# Altium PCB Breakout.PcbDoc (part 1 of 2)
Units mil, origin at the board's own origin, x right, y up, seen from the top; angles counter-clockwise.
Board outline 5500 x 6885 mil, 2 copper layers (Top Layer, Bottom Layer); 119 components, 162 nets, 1494 pads, 75 vias.
Unrouted connection lines stored in the file: 1.
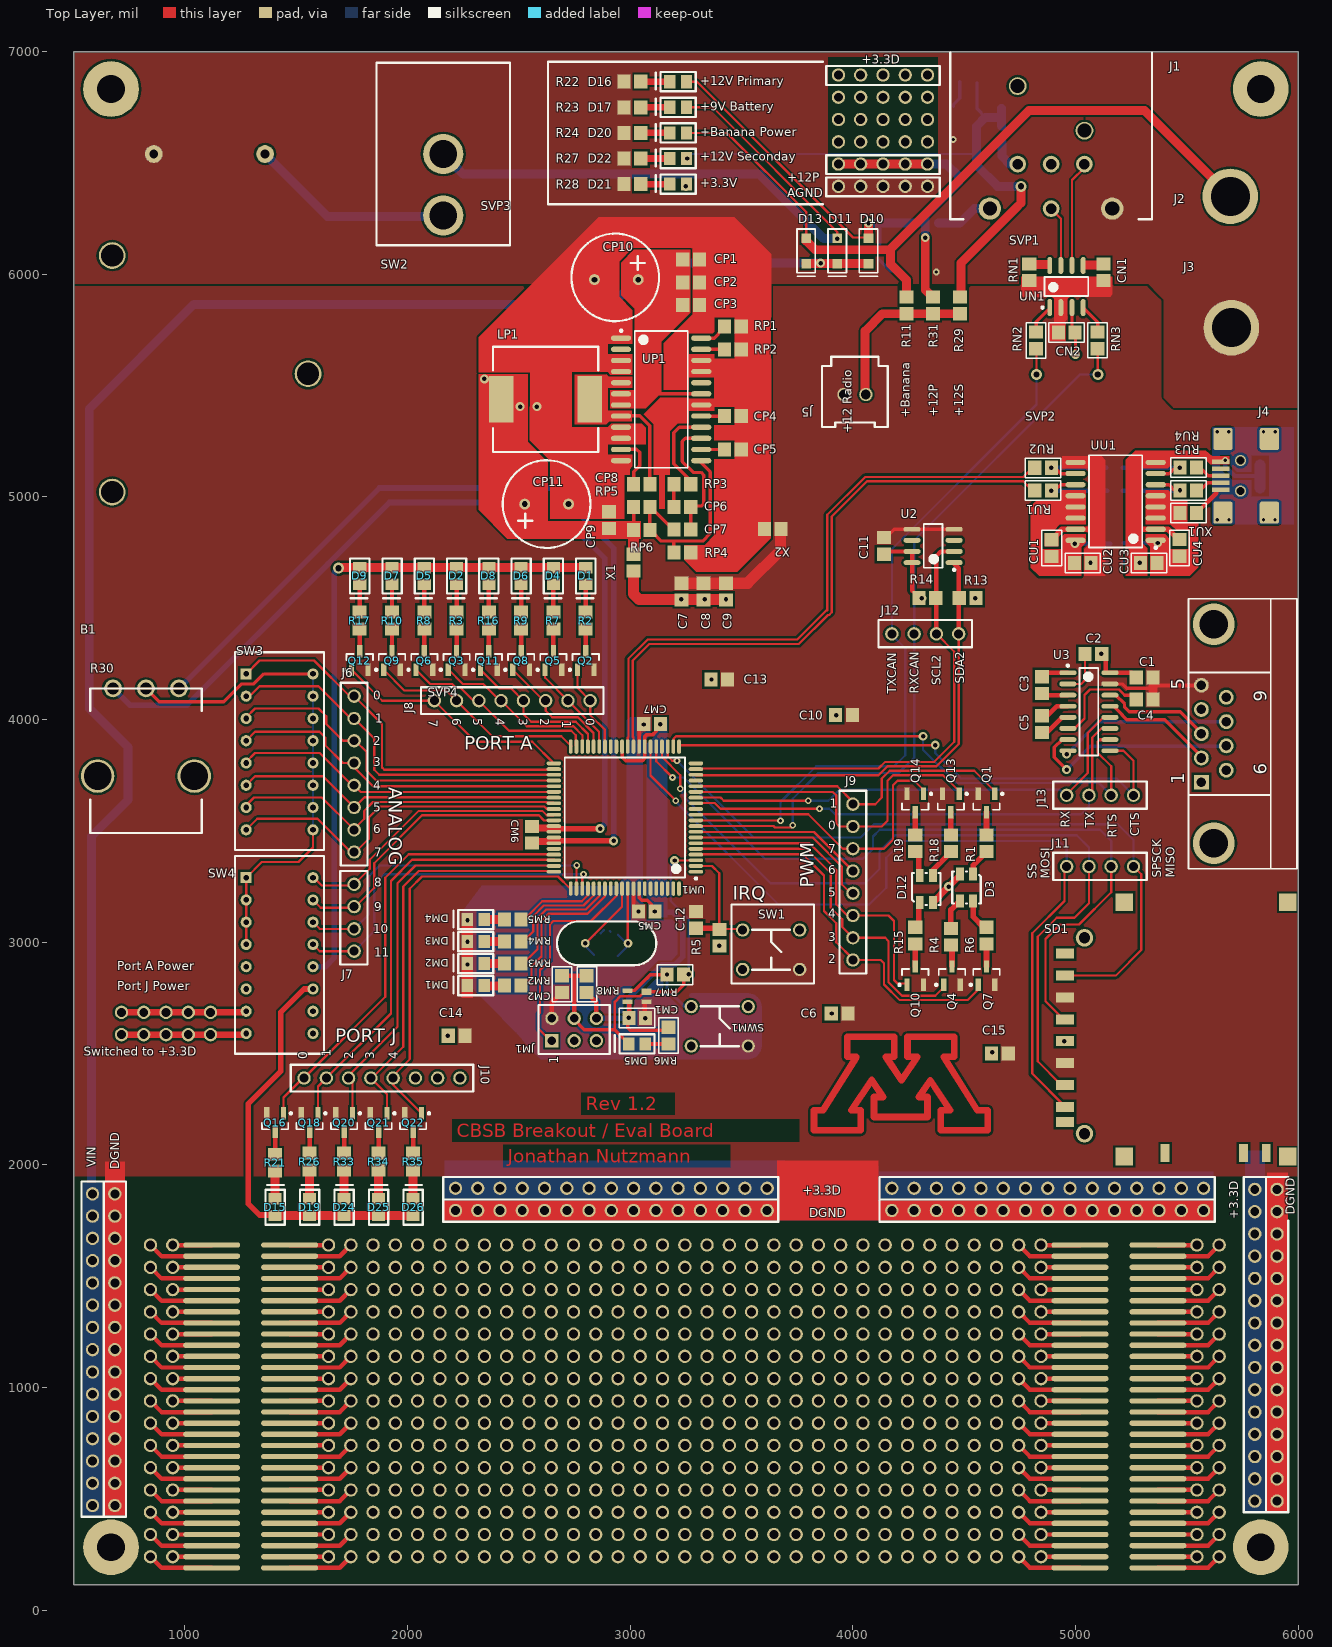
[diagram p0: Top Layer view]
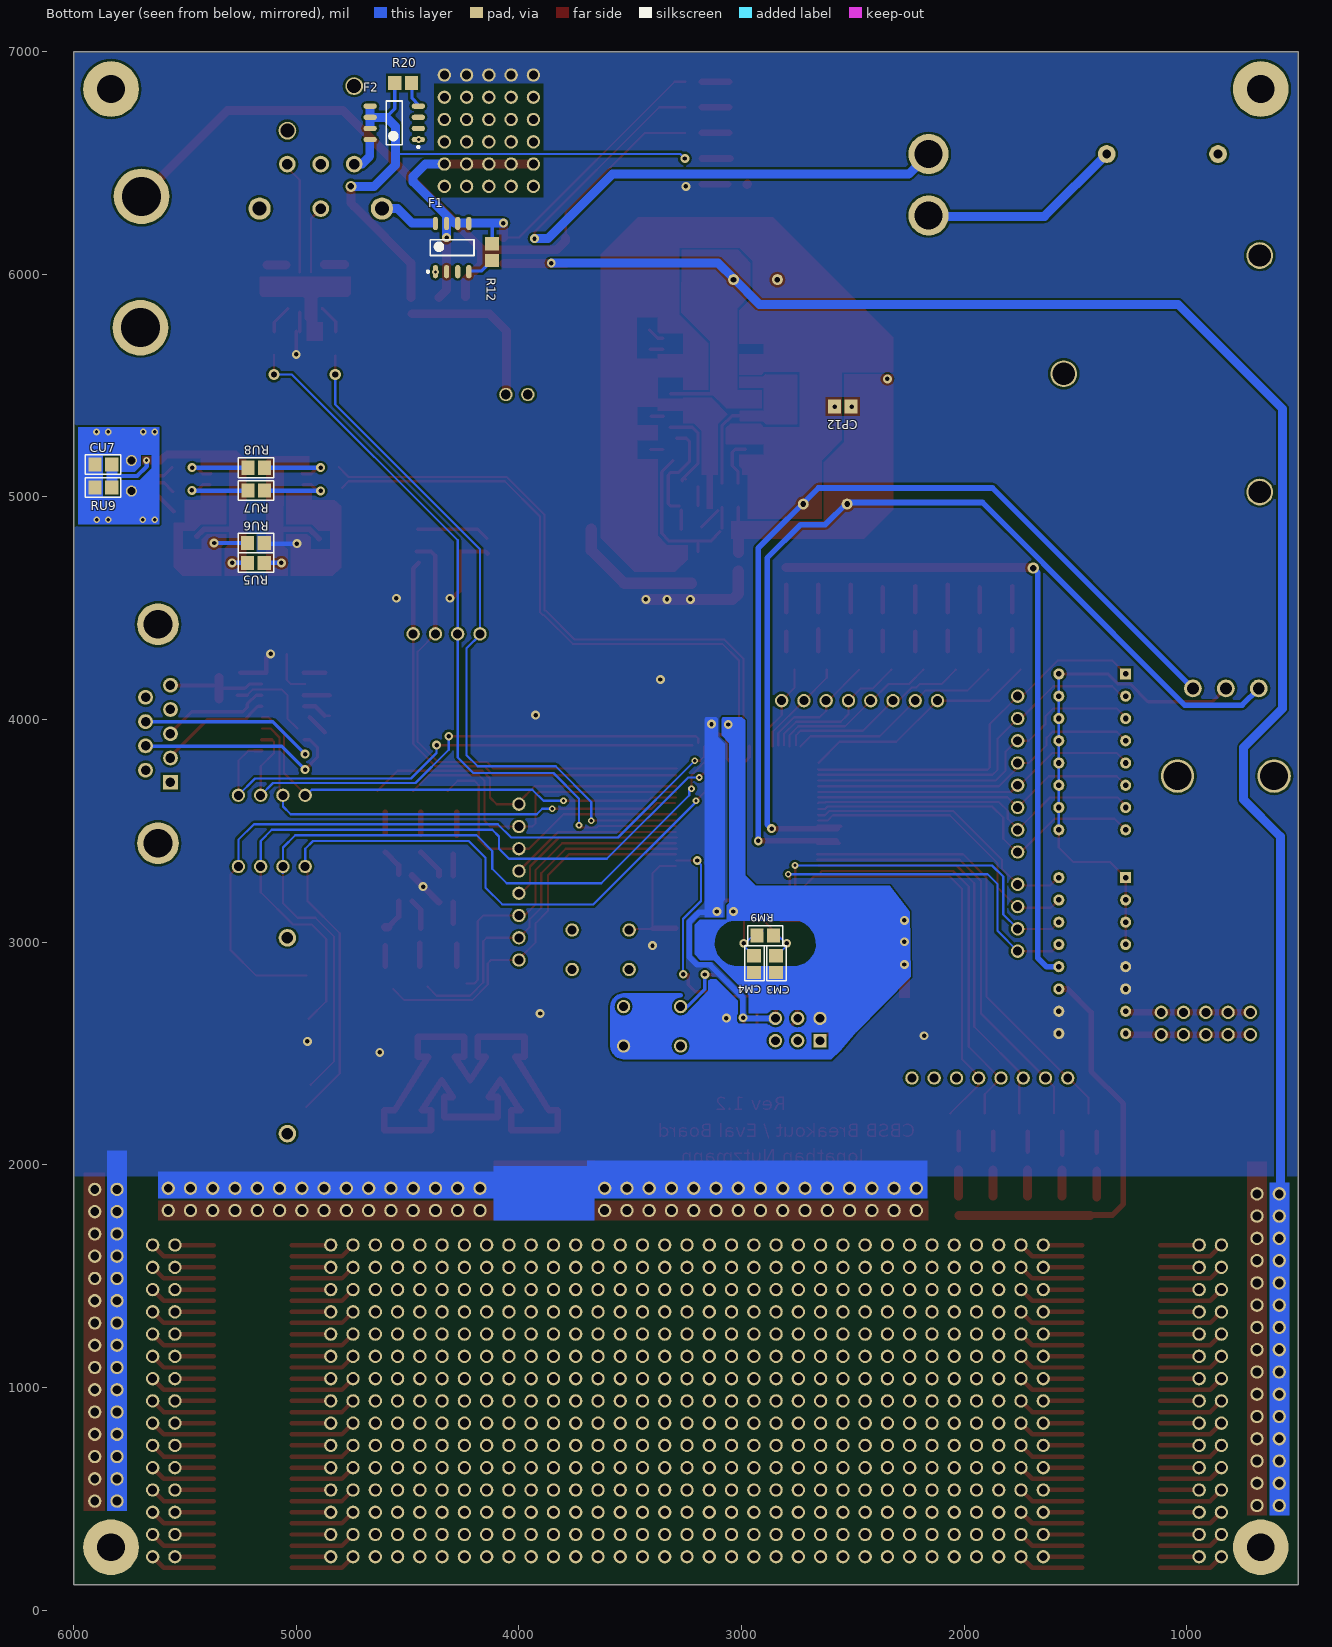
[diagram p1: Bottom Layer view, seen from below]

## Layer stack, top to bottom
Top Layer: signal copper 1.4
Dielectric: dielectric 12.6, FR-4, Dk 4.8
Bottom Layer: signal copper 1.4

## Board outline
500,115 6000,115 6000,7000 500,7000

## Design rules (kind name [scope] priority, off if disabled: settings)
Clearance SOT-23 [All vs (InComponent('U3') OR HasFootprint('SOT-23'))] p1: gap=8
Clearance Micro [All vs (InComponent('SVP4'))] p2: gap=8
Clearance [All] p3: gap=10
DiffPairsRouting [All] p1: maxlimit=10 minlimit=10 mostfreqgap=10 maxuncoupledlength=500
Height [All] p1: minheight=0 maxheight=2000 prefheight=500
HoleSize [All] p1: absolutevalues=TRUE maxlimit=250 minlimit=15 maxpercent=80.000 minpercent=20.000
PlaneConnect [All] p1: planeconnectstyle=Direct reliefexpansion=20 reliefentries=4 reliefconductorwidth=10 reliefairgap=10
PolygonConnect [All] p1: connectstyle=Direct reliefconductorwidth=10 reliefentries=4 polygonreliefangle="90 Angle"
RoutingVias [All] p1: holewidth=20 width=40 viastyle="Through Hole" minholewidth=15 minwidth=30 maxholewidth=30 maxwidth=100
SilkToSilkClearance [All] p1: silktosilkclearance=0
SilkscreenOverComponentPads [All] p1: minsilkscreentomaskgap=5
SolderMaskExpansion [All] p1: expansion=3
Width [All] p1: maxlimit=500 minlimit=10 preferedwidth=10
22 further rules are at their usual default settings.

## Classes and differential pairs
differential pair USB: +USB_P -USB_N

## Components (designator, comment, footprint, x,y, rotation, side; value= is the part's Value field where it differs from the comment)
B1 "J_9V_BATT_CLIP" "BATTERY 9V" 860,6540 r90 top
C1 "CAP 0.1uF" 0805_CAPACITOR 5310,4190 r180 top
C2 "CAP 0.1uF" 0805_CAPACITOR 5080,4295 r180 top
C3 "CAP 0.1uF" 0805_CAPACITOR 4850,4155 r270 top
C4 "CAP 0.1uF" 0805_CAPACITOR 5310,4090 r180 top
C5 "CAP 0.1uF" 0805_CAPACITOR 4850,3980 r270 top
C6 "CAP 0.1uF" 0805_CAPACITOR 3940,2680 r0 top
C7 "CAP 0.1uF" 0805_CAPACITOR 3230,4575 r90 top
C8 "CAP 0.1uF" 0805_CAPACITOR 3330,4575 r90 top
C9 "CAP 0.1uF" 0805_CAPACITOR 3430,4575 r90 top
C10 "CAP 0.1uF" 0805_CAPACITOR 3960,4020 r0 top
C11 "CAP 0.1uF" 0805_CAPACITOR 4140,4780 r90 top
C12 "CAP 0.1uF" 0805_Capacitor 3295,3100 r90 top
C13 "CAP 0.1uF" 0805_Capacitor 3400,4180 r0 top
C14 "CAP 0.1uF" 0805_Capacitor 2220,2580 r0 top
C15 "CAP 0.1uF" 0805_Capacitor 4660,2500 r0 top
D1 "D_LED_0805_YELLOW" 0805P_YELLOW 2800,4645 r90 top
D2 "D_LED_0805_YELLOW" 0805P_YELLOW 2220,4645 r90 top
D3 "D_RGB_PLCC4" "4-PLCC (RGB LED)" 4540,3300 r270 top
D4 "D_LED_0805_YELLOW" 0805P_YELLOW 2655,4645 r90 top
D5 "D_LED_0805_YELLOW" 0805P_YELLOW 2075,4645 r90 top
D6 "D_LED_0805_YELLOW" 0805P_YELLOW 2510,4645 r90 top
D7 "D_LED_0805_YELLOW" 0805P_YELLOW 1930,4645 r90 top
D8 "D_LED_0805_YELLOW" 0805P_YELLOW 2365,4645 r90 top
D9 "D_LED_0805_YELLOW" 0805P_YELLOW 1785,4645 r90 top
D10 "SCHOTTKY RECT 20V 1A SOD123F" SOD123 4070,6105 r270 top
D11 "SCHOTTKY RECT 20V 1A SOD123F" SOD123 3930,6105 r270 top
D12 "D_RGB_PLCC4" "4-PLCC (RGB LED)" 4300,3185 r90 top
D13 "SCHOTTKY RECT 20V 1A SOD123F" SOD123 3790,6105 r270 top
D15 "D_LED_0805_YELLOW" 0805P_YELLOW 1405,1810 r270 top
D16 "D_LED_0805_RED" 0805P_RED 3215,6865 r0 top
D17 "D_LED_0805_RED" 0805P_RED 3215,6750 r0 top
D19 "D_LED_0805_YELLOW" 0805P_YELLOW 1560,1810 r270 top
D20 "D_LED_0805_RED" 0805P_RED 3215,6635 r0 top
D21 "D_LED_0805_GREEN" 0805P_GREEN 3215,6405 r0 top
D22 "D_LED_0805_RED" 0805P_RED 3215,6520 r0 top
D24 "D_LED_0805_YELLOW" 0805P_YELLOW 1715,1810 r270 top
D25 "D_LED_0805_YELLOW" 0805P_YELLOW 1870,1810 r270 top
D26 "D_LED_0805_YELLOW" 0805P_YELLOW 2025,1810 r270 top
F1 "F_NIS5112" "SOIC127P600X175-8N (NIS5112)" 4300,6120 r90 bottom
F2 "F_NIS5112" "SOIC127P600X175-8N (NIS5112)" 4560,6680 r0 bottom
J1 "NC5MBH" NC5MBH 4890,6995 r0 top
J2 "POST BINDING TIN PLATE BRASS BLK" BANANA_JACK 5695,6350 r0 top
J3 "POST BINDING TIN PLATE BRASS BLK" BANANA_JACK_BLACK 5700,5760 r0 top
J4 "J_DB9F" DB9F 6245,4580 r90 top
J5 "DF1E 2-pin Male Header" DF1EC-2P-2.5DSA 3960,5460 r0 top
J6 "SOCKET_8PIN_0.100IN" 8PIN_.100IN 1760,4105 r270 top
J7 "SOCKET_4PIN_0.100IN" 4PIN_.100IN 1760,3260 r270 top
J8 "SOCKET_8PIN_0.100IN" 8PIN_.100IN 2820,4085 r180 top
J9 "SOCKET_8PIN_0.100IN" 8PIN_.100IN 4000,3620 r270 top
J10 "SOCKET_8PIN_0.100IN" 8PIN_.100IN 1535,2390 r0 top
J11 "SOCKET_4PIN_0.100IN" 4PIN_.100IN 5260,3340 r180 top
J12 "SOCKET_4PIN_0.100IN" 4PIN_.100IN 4475,4385 r180 top
J13 "SOCKET_4PIN_0.100IN" 4PIN_.100IN 5260,3660 r180 top
Q1 "RK7002BT116" SOT-23 4600,3625 r270 top
Q2 "RK7002BT116" SOT-23 2800,4265 r90 top
Q3 "RK7002BT116" SOT-23 2220,4265 r90 top
Q4 "RK7002BT116" SOT-23 4445,2850 r90 top
Q5 "RK7002BT116" SOT-23 2655,4265 r90 top
Q6 "RK7002BT116" SOT-23 2075,4265 r90 top
Q7 "RK7002BT116" SOT-23 4600,2850 r90 top
Q8 "RK7002BT116" SOT-23 2510,4265 r90 top
Q9 "RK7002BT116" SOT-23 1930,4265 r90 top
Q10 "RK7002BT116" SOT-23 4280,2850 r90 top
Q11 "RK7002BT116" SOT-23 2365,4265 r90 top
Q12 "RK7002BT116" SOT-23 1785,4265 r90 top
Q13 "RK7002BT116" SOT-23 4440,3625 r270 top
Q14 "RK7002BT116" SOT-23 4280,3625 r270 top
Q16 "RK7002BT116" SOT-23 1405,2190 r270 top
Q18 "RK7002BT116" SOT-23 1560,2190 r270 top
Q20 "RK7002BT116" SOT-23 1715,2190 r270 top
Q21 "RK7002BT116" SOT-23 1870,2190 r270 top
Q22 "RK7002BT116" SOT-23 2025,2190 r270 top
R1 "R_0805_620_1%" 0805_RESISTOR 4600,3445 r270 top
R2 "R_0805_620_1%" 0805_RESISTOR 2800,4445 r270 top
R3 "R_0805_620_1%" 0805_RESISTOR 2220,4445 r270 top
R4 "R_0805_620_1%" 0805_RESISTOR 4440,3025 r90 top
R5 "R_0805_10k_1%" 0805_RESISTOR 3400,3020 r90 top
R6 "R_0805_620_1%" 0805_RESISTOR 4600,3030 r90 top
R7 "R_0805_620_1%" 0805_RESISTOR 2655,4445 r270 top
R8 "R_0805_620_1%" 0805_RESISTOR 2075,4445 r270 top
R9 "R_0805_620_1%" 0805_RESISTOR 2510,4445 r270 top
R10 "R_0805_620_1%" 0805_RESISTOR 1930,4445 r270 top
R11 "R_0805_0" 0805_RESISTOR 4240,5860 r90 top
R12 "R_0805_56_1%" 0805_RESISTOR 4120,6100 r270 bottom
R13 "R_0805_2K_1%" 0805_RESISTOR 4515,4545 r180 top
R14 "R_0805_2K_1%" 0805_RESISTOR 4335,4545 r0 top
R15 "R_0805_620_1%" 0805_RESISTOR 4280,3030 r90 top
R16 "R_0805_620_1%" 0805_RESISTOR 2365,4445 r270 top
R17 "R_0805_620_1%" 0805_RESISTOR 1785,4445 r270 top
R18 "R_0805_620_1%" 0805_RESISTOR 4440,3445 r270 top
R19 "R_0805_620_1%" 0805_RESISTOR 4280,3445 r270 top
R20 "R_0805_56_1%" 0805_RESISTOR 4520,6860 r180 bottom
R21 "R_0805_620_1%" 0805_RESISTOR 1405,2010 r90 top
R22 "R_0805_620_1%" 0805_RESISTOR 3010,6865 r0 top
R23 "R_0805_620_1%" 0805_RESISTOR 3010,6750 r0 top
R24 "R_0805_620_1%" 0805_RESISTOR 3010,6635 r0 top
R26 "R_0805_620_1%" 0805_RESISTOR 1560,2015 r90 top
R27 "R_0805_620_1%" 0805_RESISTOR 3010,6520 r0 top
R28 "R_0805_620_1%" 0805_RESISTOR 3010,6405 r0 top
R29 "R_0805_0" 0805_RESISTOR 4480,5860 r90 top
R30 "POT 5K OHM 1/8W CARB VERTICAL" POT_296 825,4140 r270 top
R31 "R_0805_0" 0805_RESISTOR 4360,5860 r90 top
R33 "R_0805_620_1%" 0805_RESISTOR 1715,2015 r90 top
R34 "R_0805_620_1%" 0805_RESISTOR 1870,2015 r90 top
R35 "R_0805_620_1%" 0805_RESISTOR 2025,2015 r90 top
SD1 "SD_DM1AA-SF-PEJ" DM1AA 5040,2140 r90 top
SVP1 "CAN Network Circuit" SVP_CAN 4960,5950 r0 top
SVP2 "USB Isolator and Connector" SVP_USB 5520,4545 r90 top
SVP3 "Common Power Supply" SVP_POWERSUPPLY 2990,5430 r0 top
SVP4 "Common Micro" SVP_Micro 3115,4050 r180 top
SW1 "SW_TACT_SWITCH_6x6" TACT_SWITCH_6X6 3505,3055 r270 top
SW2 "SWITCH ROCKER SPST 15A W/MRKG" SWITCH_ROCKER 2160,6540 r0 top
SW3 "SW_Switch SPST 8" SWITCH_SPST_8 1275,4205 r0 top
SW4 "SW_Switch SPST 8" SWITCH_SPST_8 1275,3290 r0 top
U2 "U_TMP175" "SOIC127P600X175-8N (TMP175)" 4360,4780 r180 top
U3 "U_SN75C3232EDWR" SOIC127P600X175-16N 5060,4035 r0 top
X1 "Ferrite Bead" 0805 3015,4705 r90 top
X2 "Ferrite Bead" 0805 3640,4855 r180 top

## Footprints (in the part's own frame and the unit in brackets; to place one, negate y for a bottom-side part, rotate by r counter-clockwise, add the part's x,y. Pads: shape width x height; smd on the part's side, far side on the other; paste and mask are expansions set on the pad)
"4-PLCC (RGB LED)" [mm]
  rect 1.5x0.9 smd: 1(-0.152,0) 2(-0.152,-1.5) 3(2.902,0) 4(2.902,-1.5)
  silkscreen extent -0.45,-2.39 3.21,0.86, body extent -0.33,-2.11 3.12,0.69, height 1.91
4PIN_.100IN [mil]
  round 60 hole 40.16: 1(0,0) 2(100,0) 3(200,0) 4(300,0)
  silkscreen extent -60,-62 360,60, body extent -50,-50 350,50, height 335
8PIN_.100IN [mil]
  round 60 hole 40.16: 1(0,0) 2(100,0) 3(200,0) 4(300,0) 5(400,0) 6(500,0) 7(600,0) 8(700,0)
  silkscreen extent -60,-60 760,60, body extent -50,-50 750,50, height 335
0805 [mm] "0805 Resistor/Capacitor"
  rect 1.5x1.6 smd: 1(-0.95,0) 2(0.95,0)
  body extent -1.52,-0.76 1.52,0.76
0805_CAPACITOR [mm] "0805 Capacitor"
  rect 1.5x1.6 smd: 1(-0.95,0) 2(0.95,0)
  body extent -1.65,-0.76 1.65,0.76, height 1.24
0805_Capacitor [mm] "0805 Capacitor"
  rect 1.5x1.6 smd: 1(-0.95,0) 2(0.95,0)
  body extent -1.65,-0.76 1.65,0.76, height 1.24
0805_RESISTOR [mm] "0805 Resistor"
  rect 1.5x1.6 smd: 1(-0.95,0) 2(0.95,0)
  body extent -1.52,-0.76 1.52,0.76, height 0.5
0805P_GREEN [mm] "Chip Capacitor; Body 2.0 x 1.2 mm (LxW typ)"
  rect 1.3x1.5 smd: 1(-0.95,0) 2(0.95,0)
  silkscreen extent -2.54,-1.1 2,1.1, body extent -1.02,-0.64 0.99,0.61, height 0.79
0805P_RED [mm] "Chip Capacitor; Body 2.0 x 1.2 mm (LxW typ)"
  rect 1.3x1.5 smd: 1(-0.95,0) 2(0.95,0)
  silkscreen extent -2.54,-1.1 2,1.1, body extent -1.02,-0.64 0.99,0.61, height 0.79
0805P_YELLOW [mm] "Chip Capacitor; Body 2.0 x 1.2 mm (LxW typ)"
  rect 1.3x1.5 smd: 1(-0.95,0) 2(0.95,0)
  silkscreen extent -2.54,-1.1 2,1.1, body extent -1.02,-0.64 0.99,0.61, height 0.79
BANANA_JACK [mil]
  round 250 hole 175: 1(0,0)
  body extent -220,-220 220,220, height 900
BANANA_JACK_BLACK [mil]
  round 250 hole 175: 1(0,0)
  body extent -220,-220 220,220, height 900
"BATTERY 9V" [mil]
  round 80 hole 40: 1(0,0) 2(0,-500)
  round 120 hole 100: 3(-456,187) 4(-1518,187) 5(-987,-693)
  body extent -2054,-843 81,342, height 805
DB9F [mm]
  rect 1.69x1.69 hole 1.09: 1(-21.888,17.268)
  round 1.69 hole 1.09: 2(-19.118,17.268) 3(-16.348,17.268) 4(-13.578,17.268) 5(-10.808,17.268) 6(-20.503,14.428) 7(-17.733,14.428) 8(-14.963,14.428) 9(-12.193,14.428)
  round 4.76 hole 3.26: 10(-3.853,15.848) 11(-28.843,15.848)
  silkscreen extent -31.75,6.35 -0.95,18.75, body extent -31.73,0.38 -0.93,18.8, height 12.75
DF1EC-2P-2.5DSA [mil]
  round 60 hole 43.31: 1(0,0) 2(98.43,0)
  silkscreen extent -98,-146 197,169, body extent -98,-146 197,169, height 425
DM1AA [mm]
  round 2 hole 1.3: 0(0,0) 0(22.352,0)
  rect 1.14x2.05 smd mask+0.102: 1(3.05,2.225) 2(5.55,2.225) 3(8.05,2.225) 4(10.55,2.225) 5(13.05,2.225) 6(15.55,2.225) 7(18.05,2.225) 8(20.55,2.225) 9(1.35,2.225)
  rect 2x2 smd mask+0.102: 10(-2.6,-4.55) 11(-2.6,-23.2) 12(26.4,-23.2) 13(26.4,-4.55)
  rect 2x1 smd mask+0.102: 14(-2.2,-9.2) 15(-2.2,-18.15) 16(-2.2,-20.75)
NC5MBH [mil] "XLR 5 Male"
  round 100 hole 63: 1(274.8,-700) 5(-274.8,-700)
  round 75 hole 47.24: 2(150,-500) 3(0,-700) 4(-150,-500) 6(0,-500)
  round 80 hole 63: 7(-150,-150) 8(150,-350)
  silkscreen extent -453,-748 453,0, body extent -492,-750 492,104, height 992
POT_296 [mil]
  round 80 hole 53: 1(0,148) 2(0,0) 3(0,-148)
  round 150 hole 125: 4(394,217) 5(394,-217)
  silkscreen extent 0,-250 650,250, body extent 0,-250 650,250, height 800
SOD123 [mm]
  rect 1.1x1.1 smd: 1(-1.45,0) 2(1.45,0)
  silkscreen extent -2.5,-1.05 2.9,1.05
"SOIC127P600X175-8N (NIS5112)" [mm] "SOIC, 8-Leads, Body 5.0x4.0mm (max), Pitch 1.27mm, IPC Medium Density"
  oval 1.52x0.6 smd: 1(-2.75,1.905) 2(-2.75,0.635) 3(-2.75,-0.635) 4(-2.75,-1.905) 5(2.75,-1.905) 5(2.75,-0.635) 5(2.75,0.635) 8(2.75,1.905)
  silkscreen extent -2.87,-2.5 0.9,2.88, body extent -3.02,-2.46 2.98,2.48, height 1.55
"SOIC127P600X175-8N (TMP175)" [mm] "SOIC, 8-Leads, Body 5.0x4.0mm (max), Pitch 1.27mm, IPC Medium Density"
  oval 1.95x0.55 smd: 1(-2.4,1.905) 2(-2.4,0.635) 3(-2.4,-0.635) 4(-2.4,-1.905) 5(2.4,-1.905) 6(2.4,-0.635) 7(2.4,0.635) 8(2.4,1.905)
  silkscreen extent -2.53,-2.5 1.07,2.85, body extent -3.02,-2.46 2.98,2.48, height 1.55
SOIC127P600X175-16N [mm] "SOIC, 16-Leads, Body 10.0x4.0mm (max), Pitch 1.27mm, IPC Medium Density"
  oval 1.95x0.55 smd: 1(-2.4,4.445) 2(-2.4,3.175) 3(-2.4,1.905) 4(-2.4,0.635) 5(-2.4,-0.635) 6(-2.4,-1.905) 7(-2.4,-3.175) 8(-2.4,-4.445) 9(2.4,-4.445) 10(2.4,-3.175) 11(2.4,-1.905) 12(2.4,-0.635) 13(2.4,0.635) 14(2.4,1.905) 15(2.4,3.175) 16(2.4,4.445)
  silkscreen extent -2.52,-5 1.07,5.39, body extent -3.1,-5 3.1,5, height 1.7
SOT-23 [mm] "SOT23, 3-Leads, Body 3.0x2.7mm (max), Pitch 0.95mm, IPC Medium Density"
  rect 1.4x0.6 smd: 1(-1.05,0.95) 2(-1.05,-0.95) 3(1.05,0)
  silkscreen extent -1.17,-1.5 0.76,1.93, body extent -1.21,-1.1 0.99,1.1, height 1.1
SVP_CAN [mm]
  oval 0.55x1.95 smd: +3.3D(0.61,-2.527) CANH(-0.66,2.273) CANL(0.61,2.273) DGND(-0.66,-2.527) NetC2_1(1.88,2.273) NetR1_2(-1.93,2.273) NetR2_1(-1.93,-2.527) NetR3_1(1.88,-2.527)
  rect 1.5x1.6 smd: +3.3D(0.95,-5.385) DGND(-0.95,-5.385)
  rect 1.6x1.5 smd: DGND(-4.267,0.549) DGND(4.216,0.549) NetC2_1(4.216,2.449) NetR1_2(-4.267,2.449) NetR2_1(-3.505,-5.324) NetR3_1(3.505,-5.324) RXCAN(3.505,-7.224) TXCAN(-3.505,-7.224)
  Top Layer region: -5.207,0.991 5.207,0.991 5.207,-1.016 4.953,-1.295 0.279,-1.295 0.076,-1.524 0.076,-3.835 -0.178,-4.115 -0.178,-6.325 -2.032,-6.35 -2.032,-4.191 -1.397,-4.191 -1.397,-1.524 -1.626,-1.295 -4.928,-1.295 -5.207,-1.016
  Top Layer lines w0.254: -1.905,-2.718 -1.905,-2.515
  Top Layer lines w0.381: -3.48,-5.309 -3.48,-4.14 -2.057,-2.718 ; 0.61,-5.283 0.61,-3.048 ; 1.981,-2.667 3.531,-4.216 3.531,-5.309
  Top Layer lines w1.016: -4.47,2.362 -2.184,2.362 ; 2.21,2.337 4.343,2.337
  silkscreen extent -4.62,-8.31 4.62,0.95, body extent -5.03,-7.8 4.98,3.15, height 1.55
SVP_Micro [mil] "Micro, Clock, BDM, Reset, Debug"
  round 60 hole 40: 1(-159,1339) 3(-159,1516.17) DGND(-414.91,1516.17) SW_4(-414.91,1339)
  rect 59.06x62.99 smd: 1(-49.6,1195) 1(605.6,948) 1(605.6,1047) 1(605.6,1146) 1(605.6,1245) 2(-124.4,1195) 2(680.4,948) 2(680.4,1047) 2(680.4,1146) 2(680.4,1245) +3.3D(-20.4,70) +3.3D(3.6,911) +3.3D(121.4,1390) DGND(46.6,1390) DGND(54.4,70) DGND(78.4,911)
  rect 51.18x59.06 smd: 1(122.4,1507) 2(47.6,1507) 2(771.6,948) 2(771.6,1047) 2(771.6,1146) 2(771.6,1245) DGND(846.4,948) DGND(846.4,1047) DGND(846.4,1146) DGND(846.4,1245)
  round 39.37 hole 19.68: 1(125,1055) 2(317.13,1055)
  rect 62.99x59.06 smd far side: 1(171,1110.6) 1(270,1110.6) DGND(171,1185.4) DGND(270,1185.4)
  rect 59.06x62.99 smd far side: 1(258.4,1020) 2(183.6,1020)
  rect 62.99x59.06 smd: 1(311,1200.6) 1(421,1200.6) 2(-56,1506.4) +3.3A(556,529.6) +3.3D(-56,1431.6) +3.3D(311,1275.4) AGND(556,604.4) DGND(421,1275.4)
  rect 60x60 hole 39: 1(467,1492)
  rrect25% 45x30 smd: 2(42,1272)
  round 60 hole 39: 2(367,1492) 3(267,1492) +3.3D(267,1392) BDM_5(367,1392) DGND(467,1392)
  rrect25% 45x20 smd: 3(127,1267) +3.3D(127,1317) DGND(42,1317)
  oval 65x17 smd: 5(-179.9,630.75) 6(-179.9,605.16) 7(-179.9,579.57) 8(-179.9,553.98) 9(-179.9,528.39) 10(-179.9,502.8) 11(-179.9,477.2) 12(-179.9,451.61) 13(-179.9,426.02) 14(-179.9,400.43) 15(-179.9,374.84) 16(-179.9,349.25) 17(-179.9,323.66) 18(-179.9,298.07) 19(-179.9,272.48) 20(-179.9,246.89) 41(457.9,246.89) 42(457.9,272.48) 43(457.9,298.07) 44(457.9,323.66) 45(457.9,349.25) 46(457.9,374.84) 47(457.9,400.43) 48(457.9,426.02) 49(457.9,451.61) 50(457.9,477.2) 51(457.9,502.8) 53(457.9,553.98) 54(457.9,579.57) 56(457.9,630.75) 57(457.9,656.34) 58(457.9,681.93) 59(457.9,707.52) 60(457.9,733.11) +3.3A(457.9,528.39) AGND(457.9,605.16) U_1(-179.9,733.11) U_2(-179.9,707.52) U_3(-179.9,681.93) U_4(-179.9,656.34)
  oval 17x65 smd: 21(-104.11,171.1) 22(-78.52,171.1) 23(-52.93,171.1) 24(-27.34,171.1) 25(-1.75,171.1) 26(23.84,171.1) 29(100.61,171.1) 30(126.2,171.1) 31(151.8,171.1) 32(177.39,171.1) 33(202.98,171.1) 34(228.57,171.1) 35(254.16,171.1) 36(279.75,171.1) 37(305.34,171.1) 38(330.93,171.1) 39(356.52,171.1) 40(382.11,171.1) 61(382.11,808.9) 62(356.52,808.9) 63(330.93,808.9) 64(305.34,808.9) 65(279.75,808.9) 66(254.16,808.9) 67(228.57,808.9) 68(202.98,808.9) 69(177.39,808.9) 70(151.8,808.9) 71(126.2,808.9) 74(49.43,808.9) 75(23.84,808.9) 76(-1.75,808.9) 77(-27.34,808.9) 78(-52.93,808.9) 79(-78.52,808.9) 80(-104.11,808.9) +3.3D(49.43,171.1) +3.3D(75.02,808.9) DGND(75.02,171.1) DGND(100.61,808.9)
  Top Layer region: 821,918 872,918 872,1300 821,1300
  Top Layer pour cut-out: 23,1114 31,1123 37,1128 47,1136 57,1141 68,1146 83,1149 94,1150 352,1150 368,1147 384,1142 397,1135 410,1125 424,1109 434,1091 439,1076 441,1060 441,1048 438,1033 431,1016 423,1002 408,985 395,976 376,967 362,964 345,962 98,962 85,963 75,965 65.87,967.74 56,972 46,977 38,983 29,992 21,1002 12,1015 7,1029 4,1044 3,1056 4,1068 6,1078 9,1090 14,1099 18,1106
  Top Layer lines w10: 601,1052 551,1002 551,933 503,885 325,885 279,839 279,834 ; 592,1240 559,1207 559,1159 514,1114 514,954 482,922 307,922 228,843 228,840 228,839 228,833 228,838 ; 587,1137 532,1082 532,943 492,903 315,903 253,841 253,840 253,833 ; 585,935 579,935 510,866 333,866 306,839 306,836 305,836 304,835 ; 478,1488 527,1439 527,1373 520,1366 520,1175 476,1131 476,970 461,955 291,955 175,839 175,835 ; 367,1397 367,1393 ; 316,1055 152,891 152,851 ; 201,836 201,831 ; 152,850 152,831 ; 126,1054 126,853 126,822 ; -83,683 -179,683
  Top Layer lines w12: 184,1444 184,1318 158,1292 71,1292 52,1273
  Top Layer lines w15: 561,529 456,529 ; 555,605 455,605 ; 367,1397 321,1443 185,1443 130,1498 ; 126,1399 126,1435 115,1446 -43,1446 ; 121,1267 96,1267 36.5,1207.5 ; 100,906 100,816 ; 75,826 75,850 63,862 39,862 15,886 15,892 ; 42,1213 25,1196 -51,1196 ; 40,1273 -26,1273 -93,1273 -125,1241 -125,1196
  Top Layer lines w16: 49,162 49,126 42,119 15,119 -2,102 -2,98
  Top Layer lines w17: 75,156 75,85
  Top Layer lines w20: 468,1392 468,1322 421,1275 ; 420,1201 311,1201 ; 366,1393 366,1203 ; 312,1275 268,1319 268,1392 ; 119,1380 119,1319 ; 50,1379 50,1320 ; 48,1507 -49,1507
  Top Layer lines w40: 775,948 682,948 ; 774,1246 681,1246 ; 769,1146 676,1146 ; 766,1047 673,1047
  Bottom Layer circle w20: c-415,1516 r50
  Bottom Layer circle w20: c367,1392 r50
  Bottom Layer circle w20: c367,1492 r50
  Bottom Layer circle w20: c267,1492 r50
  Bottom Layer circle w20: c-415,1339 r50
  Bottom Layer circle w20: c-159,1516 r50
  Bottom Layer region: 269,1215 168,1215 168,1156 269,1156
  Bottom Layer region: 49,942 49,949 -73,949 -96,972 -96,1105 -71,1130 -11,1130 151,1292 151,1170 110,1170 110,1158 79,1156 54,1150 28,1132 6,1106 -2,1085 -7,1064 -6,1039 -2,1021 6,1004 20,986 35,972 50,961 72,954
  Bottom Layer pour cut-out: 421,1114 413,1123 407,1128 397,1136 387,1141 376,1146 361,1149 350,1150 92,1150 76,1147 60,1142 47,1135 34,1125 20,1109 10,1091 5,1076 3,1060 3,1048 6,1033 13,1016 21,1002 36,985 49,976 68,967 82,964 99,962 346,962 359,963 369,965 378.13,967.74 388,972 398,977 406,983 415,992 423,1002 432,1015 437,1029 440,1044 441,1056 440,1068 438,1078 435,1090 430,1099 426,1106
  Bottom Layer region: 220,1576 518,1576 558,1538 551,1532 389,1532 380,1540 373,1533 233,1533 219,1519
  Bottom Layer region: -475,1337 -438,1378 -408,1382 -381,1376 -365,1330 -378,1306 -404,1297 -434,1293 -418,1279 -159,1279 -197,1307 -202,1336 -201,1365 -180,1380 -153,1382 -131,1376 -125,1359 -112,1347 -34,1269 -34,1223 -26,1216 1,1216 98,1313 98,1368 94,1379.33 94,1405 103,1417 231,1417 234,1433 273,1436 306,1428 311,1389 309,1350 324,1350 324,1429.4 371,1435 415,1430 422,1443 632,1450 558,1538 506,1539 506,1454 429,1454 429,1533 403,1533 408,1494 403,1457 365,1451 328,1457 323,1496 333,1535 302,1535 309,1493 303,1455 266,1452 229,1458 221,1576 -159,1576 -135,1551 -122,1540 -116,1525 -118,1486 -136,1476 -166,1474 -195,1478 -208,1526 -159,1576 -419,1576 -475,1521
  Bottom Layer region: 25,46 25,121 60,156 60,873 49,884 49,943 66,954 374,954 402,967 422,984 442,1015 449,1044 450,1071 441,1099 422,1127 400,1144 367,1156 353,1158 110,1158 101,1171 147,1217 147,1369 230,1369 250,1354 383,1354 408,1370 408,1430 422,1450 554,1451 629,1454 874,1205 870,913 781,797 179,797 131,749 131,54 116,39 31,39
  Bottom Layer region: -51,46 -45,40 2,40 8,46 8,126 40,158 40,860 32,868 32,938 -51,938
  Bottom Layer lines w10: 318,1056 318,1066 278,1106 ; 317,1055 313,1055 274,1016 ; 248,1010 236,998 234,996 ; 208,999 204,1003 ; 171,1112 125,1066 125,1055 ; 170,1016 132,1054 126,1054 ; -84,682 -84,697 -72,697 -67,702 -67,865 -148,946 -148,1196
  Bottom Layer lines w15: -50,1194 -50,1261 -129,1340 -163,1340
  Bottom Layer lines w20: 232.73,1428.41 cw(c267,1392) 230.59,1357.73 ; -117.99,1368.01 ccw(c-158.5,1338.7) -158.98,1288.71
  Bottom Layer lines w25: 264,1391 121,1391 ; 121,1388 121,1299 117,1295 -26,1152 -84,1152 -120,1116 -120,960 -75,915 6,915
  silkscreen extent -372,220 909,1552, body extent -413,40 848,1547, height 418
SVP_POWERSUPPLY [mm]
  rect 1.5x1.6 smd: 1(0.625,-9.474) 1(5.248,-17.272) 1(5.248,-14.656) 1(5.248,-12.065) 1(5.248,-9.474) 1(11.013,-5.512) 1(11.013,-1.702) 1(11.013,5.918) 1(11.013,8.534) 2(2.525,-14.681) 2(2.525,-12.09) 2(2.525,-9.474) 2(7.148,-14.656) 2(7.148,-12.065) 2(7.148,-9.474) +3.3A(0.625,-14.681) +3.3A(0.625,-12.09) +12P(6.238,10.973) +12P(6.238,13.564) +12P(6.238,16.154) AGND(7.148,-17.272) AGND(8.138,10.973) AGND(8.138,13.564) AGND(8.138,16.154) AGND(12.913,-5.512) AGND(12.913,-1.702) AGND(12.913,5.918) AGND(12.913,8.534)
  rect 2.8x5.3 smd: 2(-4.348,0.203) +3.3A(-14.448,0.203)
  oval 2.3x0.6 smd: 2(-0.79,5.918) 5(-0.79,2.108) 8(-0.79,-1.702) 11(-0.79,-5.512) 13(8.36,-6.782) 14(8.36,-5.512) 15(8.36,-4.242) 16(8.36,-2.972) 17(8.36,-1.702) 20(8.36,2.108) 23(8.36,5.918) 24(8.36,7.188) +12P(-0.79,-0.432) +12P(-0.79,0.838) +12P(8.36,0.838) AGND(-0.79,-6.782) AGND(-0.79,-4.242) AGND(-0.79,-2.972) AGND(-0.79,3.378) AGND(-0.79,4.648) AGND(-0.79,7.188) AGND(8.36,-0.432) AGND(8.36,3.378) AGND(8.36,4.648)
  rect 1.5x1.6 smd far side: +3.3A(-12.228,-0.61) AGND(-10.328,-0.61)
  round 1.25 hole 0.65: +3.3A(-11.786,-11.735) +12P(1.168,13.868) AGND(-6.786,-11.735) AGND(-3.832,13.868)
  rect 1.6x1.5 smd: +3.3A(-2.159,-14.514) AGND(-2.159,-12.614)
  Top Layer region: -11.786,-15.697 1.473,-15.697 1.473,-13.691 -11.786,-13.691
  Top Layer region: 12.167,4.724 16.332,4.724 16.332,10.185 12.167,10.185
  Top Layer region: -6.1,-2.65 -2.5,-2.65 -2.5,3.05 -6.1,3.05
  Top Layer region: -8.89,-13.437 -8.89,-6.782 -11.201,-4.47 -11.176,3.302 -17.043,3.302 -17.043,7.315 -3.353,21.006 12.09,21.006 16.332,16.789 16.332,9.601 9.83,9.601 9.83,7.925 9.652,7.772 6.909,7.772 6.909,5.334 9.83,5.334 9.83,4.826 16.332,4.826 16.307,-15.646 12.471,-19.482 7.798,-19.482 6.401,-18.085 6.401,-16.408 8.738,-16.408 9.83,-15.316 9.83,-6.604 12.167,-6.604 12.167,-4.445 9.83,-4.445 9.83,-2.769 12.167,-2.769 12.167,-0.635 9.83,-0.635 9.83,-1.118 6.909,-1.118 6.909,-2.515 5.69,-2.515 4.775,-3.429 4.775,-8.382 4.216,-8.382 4.216,-12.294 3.556,-12.294 3.556,-8.382 2.946,-8.382 2.946,-2.616 1.803,-1.499 3.683,0.381 6.909,0.381 6.909,0.254 9.83,0.254 9.83,2.718 6.909,2.718 6.909,1.295 4.064,1.295 4.064,6.604 7.391,9.931 7.391,17.526 0.533,17.526 -1.016,15.977 -1.016,11.938 0.508,10.363 0.508,6.553 -2.286,6.553 -2.286,5.334 0.508,5.334 0.508,3.023 -2.032,3.023 -2.311,3.353 -6.401,3.353 -6.401,-2.972 -2.286,-2.972 -1.905,-2.591 1.575,-2.591 2.032,-3.023 2.032,-4.902 -2.261,-4.902 -2.286,-4.877 -2.286,-6.096 0.508,-6.096 0.508,-7.442 0.203,-7.747 0.203,-8.382 -0.457,-8.382 -0.457,-13.437
  Top Layer region: -2.502,-2.65 -2.496,-2.65 -2.15,-2.3 0.45,-2.3 0.45,-1.092 -2.286,-1.092 -2.286,1.524 0.508,1.524 0.508,2.769 -2.184,2.769 -2.464,3.05 -2.503,3.05
  Top Layer region: -17.043,3.048 -11.455,3.048 -11.455,-4.648 -9.144,-6.96 -9.144,-14.834 -10.033,-15.684 -13.767,-15.684 -17.043,-12.408
  Top Layer region: 7.087,17.272 7.112,10.084 3.81,6.782 3.81,0.991 2.007,-0.813 -2.032,-0.813 -2.032,1.27 0.762,1.27 0.762,10.541 -0.762,12.065 -0.762,15.799 0.66,17.272
  Top Layer lines w0.254: 6.604,-8.915 6.604,-8.941 6.706,-8.941
  Top Layer lines w0.381: -0.178,-6.731 -0.102,-6.807 ; -0.178,-5.486 0.965,-5.486 1.321,-5.842 1.321,-7.366 0.66,-8.026 0.66,-9.398 ; -0.051,0.838 8.357,0.838 ; 0.025,-1.676 1.346,-1.676 2.489,-2.819 2.489,-9.398 ; 0.635,-14.707 0.635,-12.116 ; 2.489,-14.503 2.489,-12.116 ; 2.743,-14.91 3.785,-15.951 8.509,-15.951 9.373,-15.088 9.373,-8.077 8.103,-6.807 ; 2.972,-12.471 4.813,-14.313 ; 5.232,-17.196 5.232,-15.951 ; 5.232,-11.963 5.232,-9.728 ; 7.01,-9.068 7.01,-8.915 5.232,-7.137 5.232,-3.607 5.867,-2.972 8.407,-2.972 ; 7.137,-14.605 7.137,-12.421 ; 7.366,-11.963 8.357,-11.963 8.636,-11.684 8.636,-8.433 8.331,-8.128 7.442,-8.128 6.198,-6.883 6.198,-4.597 6.553,-4.242 7.645,-4.242 ; 9.195,-1.702 10.541,-1.702 ; 9.246,-5.512 10.643,-5.512 ; 9.246,5.918 10.668,5.918 ; 9.246,7.188 9.83,7.188 10.77,8.128
  silkscreen extent -15.4,-16.73 6.81,19.12, body extent -16.03,-18.03 13.61,19.13, height 12.5
SVP_USB [mm]
  rect 1.6x1.5 smd: 1(4.039,3.901) 1(9.703,-0.594) 1(12.294,-0.594) 1(14.91,-0.594) 2(4.039,5.801) 2(9.703,1.306) 2(12.294,1.306) 2(12.294,15.966) 2(14.884,15.966) 2(14.91,1.306) +3.3D(4.039,13.345) DGND(4.039,11.445) USB_N(12.294,17.866) USB_P(14.884,17.866)
  rect 1.6x1.5 smd far side: 1(4.039,7.661) 1(6.325,7.661) 1(12.294,7.686) 1(12.649,-9.738) 1(14.884,7.686) 1(15.24,-9.738) 2(12.294,9.586) 2(12.649,-7.838) 2(14.884,9.586) 2(15.24,-7.838) +3.3D(6.325,9.561) DGND(4.039,9.561)
  rect 1.5x1.6 smd: 1(4.79,1.346) 2(6.69,1.346) +3.3D(4.765,15.926) DGND(6.665,15.926)
  oval 0.6x2.3 smd: 1(6.604,4.061) 2(7.874,4.061) 3(9.144,4.061) 4(10.414,4.061) 5(11.684,4.061) 6(12.954,4.061) 7(14.224,4.061) 8(15.494,4.061) 10(14.224,13.211) 11(12.954,13.211) +3.3D(6.604,13.211) +3.3D(9.144,13.211) +3.3D(10.414,13.211) +3.3D(11.684,13.211) DGND(7.874,13.211) DGND(15.494,13.211)
  rect 0.5x2 smd: 1(12.37,-3.353) 2(13.17,-3.353) 3(13.97,-3.353) 4(14.77,-3.353) 5(15.57,-3.353)
  rrect20% 2.5x2.2 smd: 6(9.77,-8.903) 6(9.77,-3.603) 6(18.17,-8.903) 6(18.17,-3.603)
  round 1.27 hole 0.9: 10(12.22,-5.603) 10(15.72,-5.603)
  Top Layer region: 2.54,12.217 5.588,12.217 6.071,11.735 14.808,11.76 14.808,14.707 16.18,14.707 16.18,10.222 15.748,9.804 2.54,9.804
  Top Layer region: 7.29,12.065 6.325,12.065 5.817,12.573 2.54,12.573 2.54,17.374 3.454,18.313 10.566,18.313 11.201,17.602 11.201,14.961 12.141,14.961 12.344,14.757 12.344,12.065 8.458,12.065 8.458,14.986 7.722,15.723 7.722,17.069 5.588,17.069 5.588,14.834 6.934,14.834 7.29,14.478
  Top Layer region: 2.54,5.029 5.715,5.029 6.223,5.537 14.834,5.537 14.834,2.676 15.18,2.311 15.977,2.311 15.977,-1.448 15.291,-2.159 15.291,-4.343 16.18,-4.343 16.18,-2.413 16.84,-1.651 16.84,6.426 15.773,7.493 2.54,7.493
  Top Layer region: 2.565,4.674 5.867,4.674 6.401,5.207 7.29,5.207 7.29,2.997 6.731,2.438 5.613,2.438 5.613,0.279 7.696,0.279 7.696,1.626 8.458,2.388 8.458,5.207 12.344,5.207 12.344,2.642 12.014,2.311 11.201,2.311 11.201,0.483 8.636,0.483 8.636,-0.762 3.531,-0.787 2.565,0.178
  Top Layer lines w0.381: 15.037,15.748 14.199,14.91 14.199,13.894 ; 12.421,15.443 12.954,14.91 12.954,13.995 ; 14.199,3.454 14.199,2.54 14.961,1.778 ; 12.929,3.353 12.929,2.54 12.344,1.956 ; 12.167,-0.864 13.157,-1.854 13.157,-2.642 ; 14.935,-0.965 13.97,-1.93 13.97,-2.921
  Top Layer lines w0.508: 9.906,-0.762 11.989,-2.845 12.319,-2.845
  Top Layer lines w0.635: 6.807,15.799 7.874,14.732 7.874,10.744 ; 7.874,5.969 7.874,2.667 7.087,1.88
  Bottom Layer region: 8.433,-2.413 8.433,-11.684 19.507,-11.684 19.507,-2.413 16.358,-2.413 16.358,-4.521 15.138,-4.521 14.453,-5.207 14.453,-6.833 16.307,-6.833 16.307,-8.89 11.582,-8.89 11.582,-6.833 13.437,-6.833 13.437,-4.648 14.834,-3.251 16.358,-3.251 16.358,-2.413
  Bottom Layer lines w0.508: 12.243,15.977 12.243,9.576 ; 14.91,15.977 14.91,9.677 ; 6.223,13.259 6.223,9.271 ; 4.039,11.506 4.039,9.55 ; 4.039,7.849 4.039,5.893 ; 12.268,7.823 12.268,1.295 ; 14.91,7.823 14.91,1.321 ; 6.299,7.722 6.299,3.835 ; 15.723,-3.861 15.037,-3.861 13.945,-4.953 13.945,-7.823
  Bottom Layer lines w1.27: 12.598,-7.823 15.215,-7.823
  Mechanical 15 keep-out region: 12.065,-4.369 15.875,-4.369 15.875,-5.639 17.907,-5.639 17.907,-12.116 10.033,-12.116 10.033,-5.639 12.065,-5.639
  silkscreen extent 2.9,-1.68 16.3,18.95, body extent 3.28,-11.84 18.9,18.44, height 4.12
SWITCH_ROCKER [mil]
  round 180 hole 125: 1(0,0) 2(0,-276)
  silkscreen extent -300,-410 300,410, body extent -300,-410 300,410, height 600
SWITCH_SPST_8 [mil]
  rect 50x50 hole 25: 1(0,0)
  round 50 hole 25: 2(0,-100) 3(0,-200) 4(0,-300) 5(0,-400) 6(0,-500) 7(0,-600) 8(0,-700) 9(300,-700) 10(300,-600) 11(300,-500) 12(300,-400) 13(300,-300) 14(300,-200) 15(300,-100) 16(300,0)
  silkscreen extent -50,-791 350,97, body extent -39,-789 341,96, height 350
TACT_SWITCH_6X6 [mil]
  round 60 hole 40: 1(0,0) 2(177.17,255.91) 3(177.17,0) 4(0,255.91)
  silkscreen extent -1,43 179,213, body extent -29,0 207,255, height 169

## Part data
B1: "HOLDER BATTERY 9V PC MOUNT"
C1 C2 C3 C4 C5 C11 C12 C13 C14 C15: library part C_0805_0.1uF, "CAP CERM 0.1uF"
C6 C7 C8 C9 C10: library part C_0805_0.1uF_1, "CAP CERM 0.1uF"
D1 D2 D4 D5 D6 D7 D8 D9 D15 D19 D24 D25 D26: "LED 595NM AMBER DIFF SMD 0805"
D3 D12: "LED RED/GREEN/BLUE PLCC4 SMD"
D10 D11 D13: library part D_Schottky_PMEG2010
D16 D17 D20 D22: "LED CHIPLED 645NM RED DIFF 0805"
D21: "LED CHIPLED 570NM GREEN 0805 SMD"
F1 F2: "IC ELECTRONIC FUSE HOTSWAP 8SOIC"
J1: "C3 Bus Connector"
J2 J3: library part J_Banana_Post
J4: "DB9F connection"
J5: library part DF1E_2_S_1, "2-pin Hirose"
J6 J8 J9 J10: library part J_SOCKET_8PIN_.100IN, "CONN HEADER FEM 8POS .1\" SGL GLD"
J7 J11 J12 J13: library part J_SOCKET_4PIN_.100IN, "CONN HEADER FEMALE 4POS .1\" GOLD"
Q1 Q2 Q3 Q4 Q5 Q6 Q7 Q8 Q9 Q10 Q11 Q12 Q13 Q14 Q16 Q18 Q20 Q21 Q22: library part Q_N_60V_250MA_SOT23, "MOSFET N-CH 60V 250MA SOT-23"
R1 R2 R3 R4 R6 R7 R8 R9 R10 R15 R16 R17 R18 R19 R21 R22 R23 R24 R26 R27 R28 R33 R34 R35: "RES 620 OHM 1/8W 1% 0805 SMD"
R5: library part R_0805_10K_1%, "RES 10K OHM 1/8W 1% 0805 SMD"
R11 R29 R31: "RES 0 OHM 0805 SMD"
R12 R20: "RES 56 OHM 1/8W 1% 0805 SMD"
R13 R14: library part R_0805_2K_1%_2K, "RES 2K OHM 1/8W 1% 0805 SMD"
R30: library part R_POT_5k
SD1: "CONN MEMORY SECURE DIGITAL SMD"
SVP1: library part SVP_CAN
SVP2: library part SVP_USB_ISOLATION, "Isolates USB and has output connector"
SVP3: library part SVP_LM2650PS, "Buck converter to take the +12P rail to +3.3"
SVP4: library part SVP_Micro, "Micro/BDM/Reset/Clock"
SW1: "SWITCH TACT 6MM BLACK 160GF"
SW2: library part SW_SPST_Rocker
SW3 SW4: "SWITCH SPST GOLD 8 SEC"
U2: "I2C Temperature Sensor SOIC-8"
U3: "IC LINE DRVR/RCVR RS232 16-SOIC"
X1 X2: library part X_FERRITE_0805, "FERRITE CHIP BEAD 600 OHM SMD"

## Free pads (board coordinates)
  round 250 hole 125: 1(668,283) 1(668,6832) 1(5832,283) 1(5832,6832)
  oval 255.91x23.62 smd: 42(1120,190) 42(1120,240) 42(1120,290) 42(1120,340) 42(1120,390) 42(1120,440) 42(1120,490) 42(1120,540) 42(1120,590) 42(1120,640) 42(1120,690) 42(1120,740) 42(1120,790) 42(1120,840) 42(1120,890) 42(1120,940) 42(1120,990) 42(1120,1040) 42(1120,1090) 42(1120,1140) 42(1120,1190) 42(1120,1240) 42(1120,1290) 42(1120,1340) 42(1120,1390) 42(1120,1440) 42(1120,1490) 42(1120,1540) 42(1120,1590) 42(1120,1640) 42(1470,190) 42(1470,240) 42(1470,290) 42(1470,340) 42(1470,390) 42(1470,440) 42(1470,490) 42(1470,540) 42(1470,590) 42(1470,640) 42(1470,690) 42(1470,740) 42(1470,790) 42(1470,840) 42(1470,890) 42(1470,940) 42(1470,990) 42(1470,1040) 42(1470,1090) 42(1470,1140) 42(1470,1190) 42(1470,1240) 42(1470,1290) 42(1470,1340) 42(1470,1390) 42(1470,1440) 42(1470,1490) 42(1470,1540) 42(1470,1590) 42(1470,1640) 42(5020,190) 42(5020,240) 42(5020,290) 42(5020,340) 42(5020,390) 42(5020,440) 42(5020,490) 42(5020,540) 42(5020,590) 42(5020,640) 42(5020,690) 42(5020,740) 42(5020,790) 42(5020,840) 42(5020,890) 42(5020,940) 42(5020,990) 42(5020,1040) 42(5020,1090) 42(5020,1140) 42(5020,1190) 42(5020,1240) 42(5020,1290) 42(5020,1340) 42(5020,1390) 42(5020,1440) 42(5020,1490) 42(5020,1540) 42(5020,1590) 42(5020,1640) 42(5370,190) 42(5370,240) 42(5370,290) 42(5370,340) 42(5370,390) 42(5370,440) 42(5370,490) 42(5370,540) 42(5370,590) 42(5370,640) 42(5370,690) 42(5370,740) 42(5370,790) 42(5370,840) 42(5370,890) 42(5370,940) 42(5370,990) 42(5370,1040) 42(5370,1090) 42(5370,1140) 42(5370,1190) 42(5370,1240) 42(5370,1290) 42(5370,1340) 42(5370,1390) 42(5370,1440) 42(5370,1490) 42(5370,1540) 42(5370,1590) 42(5370,1640)
  round 60 hole 40: 106(4645,240) 107(4645,340) 108(945,240) 108(1645,240) 108(4645,440) 108(4845,240) 108(5545,240) 109(945,340) 109(1645,340) 109(4645,540) 109(4845,340) 109(5545,340) 110(945,440) 110(1645,440) 110(4645,640) 110(4845,440) 110(5545,440) 111(945,540) 111(1645,540) 111(4645,740) 111(4845,540) 111(5545,540) 112(945,640) 112(1645,640) 112(4645,840) 112(4845,640) 112(5545,640) 113(945,740) 113(1645,740) 113(4645,940) 113(4845,740) 113(5545,740) 114(945,840) 114(1645,840) 114(4645,1040) 114(4845,840) 114(5545,840) 115(845,240) 115(945,940) 115(1645,940) 115(1745,240) 115(1845,240) 115(1845,340) 115(1845,440) 115(1845,540) 115(1845,640) 115(1845,740) 115(1845,840) 115(1845,940) 115(1845,1040) 115(1845,1140) 115(1845,1240) 115(1845,1340) 115(1845,1440) 115(1845,1540) 115(1845,1640) 115(1945,240) 115(1945,340) 115(1945,440) 115(1945,540) 115(1945,640) 115(1945,740) 115(1945,840) 115(1945,940) 115(1945,1040) 115(1945,1140) 115(1945,1240) 115(1945,1340) 115(1945,1440) 115(1945,1540) 115(1945,1640) 115(4645,1140) 115(4745,240) 115(4845,940) 115(5545,940) 115(5645,240) 116(845,340) 116(945,1040) 116(1645,1040) 116(1745,340) 116(2045,240) 116(2045,340) 116(2045,440) 116(2045,540) 116(2045,640) 116(2045,740) 116(2045,840) 116(2045,940) 116(2045,1040) 116(2045,1140) 116(2045,1240) 116(2045,1340) 116(2045,1440) 116(2045,1540) 116(2045,1640) 116(4645,1240) 116(4745,340) 116(4845,1040) 116(5545,1040) 116(5645,340) 117(845,440) 117(945,1140) 117(1645,1140) 117(1745,440) 117(2145,240) 117(2145,340) 117(2145,440) 117(2145,540) 117(2145,640) 117(2145,740) 117(2145,840) 117(2145,940) 117(2145,1040) 117(2145,1140) 117(2145,1240) 117(2145,1340) 117(2145,1440) 117(2145,1540) 117(2145,1640) 117(4645,1340) 117(4745,440) 117(4845,1140) 117(5545,1140) 117(5645,440) 118(845,540) 118(945,1240) 118(1645,1240) 118(1745,540) 118(2245,240) 118(2245,340) 118(2245,440) 118(2245,540) 118(2245,640) 118(2245,740) 118(2245,840) 118(2245,940) 118(2245,1040) 118(2245,1140) 118(2245,1240) 118(2245,1340) 118(2245,1440) 118(2245,1540) 118(2245,1640) 118(4645,1440) 118(4745,540) 118(4845,1240) 118(5545,1240) 118(5645,540) 119(845,640) 119(945,1340) 119(1645,1340) 119(1745,640) 119(2345,240) 119(2345,340) 119(2345,440) 119(2345,540) 119(2345,640) 119(2345,740) 119(2345,840) 119(2345,940) 119(2345,1040) 119(2345,1140) 119(2345,1240) 119(2345,1340) 119(2345,1440) 119(2345,1540) 119(2345,1640) 119(4645,1540) 119(4745,640) 119(4845,1340) 119(5545,1340) 119(5645,640) 120(585,470) 120(585,570) 120(585,670) 120(585,770) 120(585,870) 120(585,970) 120(585,1070) 120(585,1170) 120(585,1270) 120(585,1370) 120(585,1470) 120(585,1570) 120(585,1670) 120(585,1770) 120(585,1870) 120(845,740) 120(945,1440) 120(1645,1440) 120(1745,740) 120(2215,1795) 120(2315,1795) 120(2415,1795) 120(2445,240) 120(2445,340) 120(2445,440) 120(2445,540) 120(2445,640) 120(2445,740) 120(2445,840) 120(2445,940) 120(2445,1040) 120(2445,1140) 120(2445,1240) 120(2445,1340) 120(2445,1440) 120(2445,1540) 120(2445,1640) 120(2515,1795) 120(2615,1795) 120(2715,1795) 120(2815,1795) 120(2915,1795) 120(3015,1795) 120(3115,1795) 120(3215,1795) 120(3315,1795) 120(3415,1795) 120(3515,1795) 120(3615,1795) 120(4175,1795) 120(4275,1795) 120(4375,1795) 120(4475,1795) 120(4575,1795) 120(4645,1640) 120(4675,1795) 120(4745,740) 120(4775,1795) 120(4845,1440) 120(4875,1795) 120(4975,1795) 120(5075,1795) 120(5175,1795) 120(5275,1795) 120(5375,1795) 120(5475,1795) 120(5545,1440) 120(5575,1795) 120(5645,740) 120(5805,490) 120(5805,590) 120(5805,690) 120(5805,790) 120(5805,890) 120(5805,990) 120(5805,1090) 120(5805,1190) 120(5805,1290) 120(5805,1390) 120(5805,1490) 120(5805,1590) 120(5805,1690) 120(5805,1790) 120(5805,1890) 121(685,470) 121(685,570) 121(685,670) 121(685,770) 121(685,870) 121(685,970) 121(685,1070) 121(685,1170) 121(685,1270) 121(685,1370) 121(685,1470) 121(685,1570) 121(685,1670) 121(685,1770) 121(685,1870) 121(845,840) 121(945,1540) 121(1645,1540) 121(1745,840) 121(2215,1895) 121(2315,1895) 121(2415,1895) 121(2515,1895) 121(2545,240) 121(2545,340) 121(2545,440) 121(2545,540) 121(2545,640) 121(2545,740) 121(2545,840) 121(2545,940) 121(2545,1040) 121(2545,1140) 121(2545,1240) 121(2545,1340) 121(2545,1440) 121(2545,1540) 121(2545,1640) 121(2615,1895) 121(2715,1895) 121(2815,1895) 121(2915,1895) 121(3015,1895) 121(3115,1895) 121(3215,1895) 121(3315,1895) 121(3415,1895) 121(3515,1895) 121(3615,1895) 121(4175,1895) 121(4275,1895) 121(4375,1895) 121(4475,1895) 121(4575,1895) 121(4675,1895) 121(4745,840) 121(4775,1895) 121(4845,1540) 121(4875,1895) 121(4975,1895) 121(5075,1895) 121(5175,1895) 121(5275,1895) 121(5375,1895) 121(5475,1895) 121(5545,1540) 121(5575,1895) 121(5645,840) 121(5905,490) 121(5905,590) 121(5905,690) 121(5905,790) 121(5905,890) 121(5905,990) 121(5905,1090) 121(5905,1190) 121(5905,1290) 121(5905,1390) 121(5905,1490) 121(5905,1590) 121(5905,1690) 121(5905,1790) 121(5905,1890) 122(845,940) 122(945,1640) 122(1645,1640) 122(1745,940) 122(2645,240) 122(2645,340) 122(2645,440) 122(2645,540) 122(2645,640) 122(2645,740) 122(2645,840) 122(2645,940) 122(2645,1040) 122(2645,1140) 122(2645,1240) 122(2645,1340) 122(2645,1440) 122(2645,1540) 122(2645,1640) 122(4745,940) 122(4845,1640) 122(5545,1640) 122(5645,940) 123(845,1040) 123(1745,1040) 123(2745,240) 123(2745,340) 123(2745,440) 123(2745,540) 123(2745,640) 123(2745,740) 123(2745,840) 123(2745,940) 123(2745,1040) 123(2745,1140) 123(2745,1240) 123(2745,1340) 123(2745,1440) 123(2745,1540) 123(2745,1640) 123(4745,1040) 123(5645,1040) 124(845,1140) 124(1745,1140) 124(2845,240) 124(2845,340) 124(2845,440) 124(2845,540) 124(2845,640) 124(2845,740) 124(2845,840) 124(2845,940) 124(2845,1040) 124(2845,1140) 124(2845,1240) 124(2845,1340) 124(2845,1440) 124(2845,1540) 124(2845,1640) 124(4745,1140) 124(5645,1140) 125(845,1240) 125(1745,1240) 125(2945,240) 125(2945,340) 125(2945,440) 125(2945,540) 125(2945,640) 125(2945,740) 125(2945,840) 125(2945,940) 125(2945,1040) 125(2945,1140) 125(2945,1240) 125(2945,1340) 125(2945,1440) 125(2945,1540) 125(2945,1640) 125(4745,1240) 125(5645,1240) 126(845,1340) 126(1745,1340) 126(3045,240) 126(3045,340) 126(3045,440) 126(3045,540) 126(3045,640) 126(3045,740) 126(3045,840) 126(3045,940) 126(3045,1040) 126(3045,1140) 126(3045,1240) 126(3045,1340) 126(3045,1440) 126(3045,1540) 126(3045,1640) 126(4745,1340) 126(5645,1340) 127(845,1440) 127(1745,1440) 127(3145,240) 127(3145,340) 127(3145,440) 127(3145,540) 127(3145,640) 127(3145,740) 127(3145,840) 127(3145,940) 127(3145,1040) 127(3145,1140) 127(3145,1240) 127(3145,1340) 127(3145,1440) 127(3145,1540) 127(3145,1640) 127(4745,1440) 127(5645,1440) 128(845,1540) 128(1745,1540) 128(3245,240) 128(3245,340) 128(3245,440) 128(3245,540) 128(3245,640) 128(3245,740) 128(3245,840) 128(3245,940) 128(3245,1040) 128(3245,1140) 128(3245,1240) 128(3245,1340) 128(3245,1440) 128(3245,1540) 128(3245,1640) 128(4745,1540) 128(5645,1540) 129(845,1640) 129(1745,1640) 129(3345,240) 129(3345,340) 129(3345,440) 129(3345,540) 129(3345,640) 129(3345,740) 129(3345,840) 129(3345,940) 129(3345,1040) 129(3345,1140) 129(3345,1240) 129(3345,1340) 129(3345,1440) 129(3345,1540) 129(3345,1640) 129(4745,1640) 129(5645,1640) 130(3445,240) 130(3445,340) 130(3445,440) 130(3445,540) 130(3445,640) 130(3445,740) 130(3445,840) 130(3445,940) 130(3445,1040) 130(3445,1140) 130(3445,1240) 130(3445,1340) 130(3445,1440) 130(3445,1540) 130(3445,1640) 131(3545,240) 131(3545,340) 131(3545,440) 131(3545,540) 131(3545,640) 131(3545,740) 131(3545,840) 131(3545,940) 131(3545,1040) 131(3545,1140) 131(3545,1240) 131(3545,1340) 131(3545,1440) 131(3545,1540) 131(3545,1640) 132(3645,240) 132(3645,340) 132(3645,440) 132(3645,540) 132(3645,640) 132(3645,740) 132(3645,840) 132(3645,940) 132(3645,1040) 132(3645,1140) 132(3645,1240) 132(3645,1340) 132(3645,1440) 132(3645,1540) 132(3645,1640) 133(3745,240) 133(3745,340) 133(3745,440) 133(3745,540) 133(3745,640) 133(3745,740) 133(3745,840) 133(3745,940) 133(3745,1040) 133(3745,1140) 133(3745,1240) 133(3745,1340) 133(3745,1440) 133(3745,1540) 133(3745,1640) 134(3845,240) 134(3845,340) 134(3845,440) 134(3845,540) 134(3845,640) 134(3845,740) 134(3845,840) 134(3845,940) 134(3845,1040) 134(3845,1140) 134(3845,1240) 134(3845,1340) 134(3845,1440) 134(3845,1540) 134(3845,1640) 135(715,2585) 135(715,2685) 135(3935,6395) 135(3935,6495) 135(3935,6595) 135(3935,6695) 135(3935,6795) 135(3935,6895) 135(3945,240) 135(3945,340) 135(3945,440) 135(3945,540) 135(3945,640) 135(3945,740) 135(3945,840) 135(3945,940) 135(3945,1040) 135(3945,1140) 135(3945,1240) 135(3945,1340) 135(3945,1440) 135(3945,1540) 135(3945,1640) 136(815,2585) 136(815,2685) 136(4035,6395) 136(4035,6495) 136(4035,6595) 136(4035,6695) 136(4035,6795) 136(4035,6895) 136(4045,240) 136(4045,340) 136(4045,440) 136(4045,540) 136(4045,640) 136(4045,740) 136(4045,840) 136(4045,940) 136(4045,1040) 136(4045,1140) 136(4045,1240) 136(4045,1340) 136(4045,1440) 136(4045,1540) 136(4045,1640) 137(915,2585) 137(915,2685) 137(4135,6395) 137(4135,6495) 137(4135,6595) 137(4135,6695) 137(4135,6795) 137(4135,6895) 137(4145,240) 137(4145,340) 137(4145,440) 137(4145,540) 137(4145,640) 137(4145,740) 137(4145,840) 137(4145,940) 137(4145,1040) 137(4145,1140) 137(4145,1240) 137(4145,1340) 137(4145,1440) 137(4145,1540) 137(4145,1640) 138(1015,2585) 138(1015,2685) 138(4235,6395) 138(4235,6495) 138(4235,6595) 138(4235,6695) 138(4235,6795) 138(4235,6895) 138(4245,240) 138(4245,340) 138(4245,440) 138(4245,540) 138(4245,640) 138(4245,740) 138(4245,840) 138(4245,940) 138(4245,1040) 138(4245,1140) 138(4245,1240) 138(4245,1340) 138(4245,1440) 138(4245,1540) 138(4245,1640) 139(1115,2585) 139(1115,2685) 139(4335,6395) 139(4335,6495) 139(4335,6595) 139(4335,6695) 139(4335,6795) 139(4335,6895) 139(4345,240) 139(4345,340) 139(4345,440) 139(4345,540) 139(4345,640) 139(4345,740) 139(4345,840) 139(4345,940) 139(4345,1040) 139(4345,1140) 139(4345,1240) 139(4345,1340) 139(4345,1440) 139(4345,1540) 139(4345,1640) 140(4445,240) 140(4445,340) 140(4445,440) 140(4445,540) 140(4445,640) 140(4445,740) 140(4445,840) 140(4445,940) 140(4445,1040) 140(4445,1140) 140(4445,1240) 140(4445,1340) 140(4445,1440) 140(4445,1540) 140(4445,1640) 141(4545,240) 141(4545,340) 141(4545,440) 141(4545,540) 141(4545,640) 141(4545,740) 141(4545,840) 141(4545,940) 141(4545,1040) 141(4545,1140) 141(4545,1240) 141(4545,1340) 141(4545,1440) 141(4545,1540) 141(4545,1640)

## Via types
v1: diameter 40, hole 20, Top Layer to Bottom Layer, 50 vias
v2: diameter 30, hole 15, Top Layer to Bottom Layer, 21 vias
v3: diameter 50, hole 28, Top Layer to Bottom Layer, 4 vias